# Altium PCB ring_rx_v3_sensor.PcbDoc
Units mil, origin at the board's own origin, x right, y up, seen from the top; angles counter-clockwise.
Board outline 1084 x 715 mil, 2 copper layers (L1, L2), stack 62.8 mil thick; 44 components, 30 nets, 125 pads, 35 vias.
Unrouted connection lines stored in the file: 28.
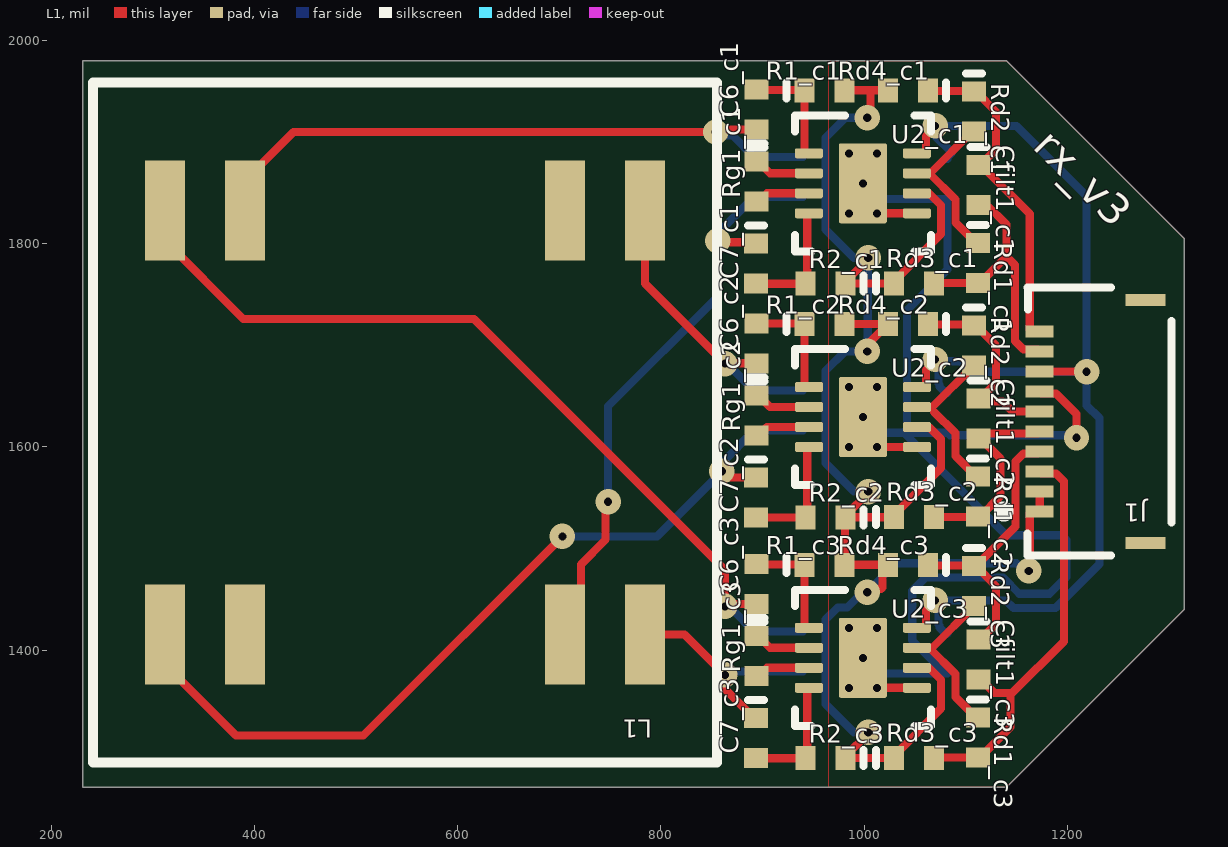
[diagram p0: L1 view]
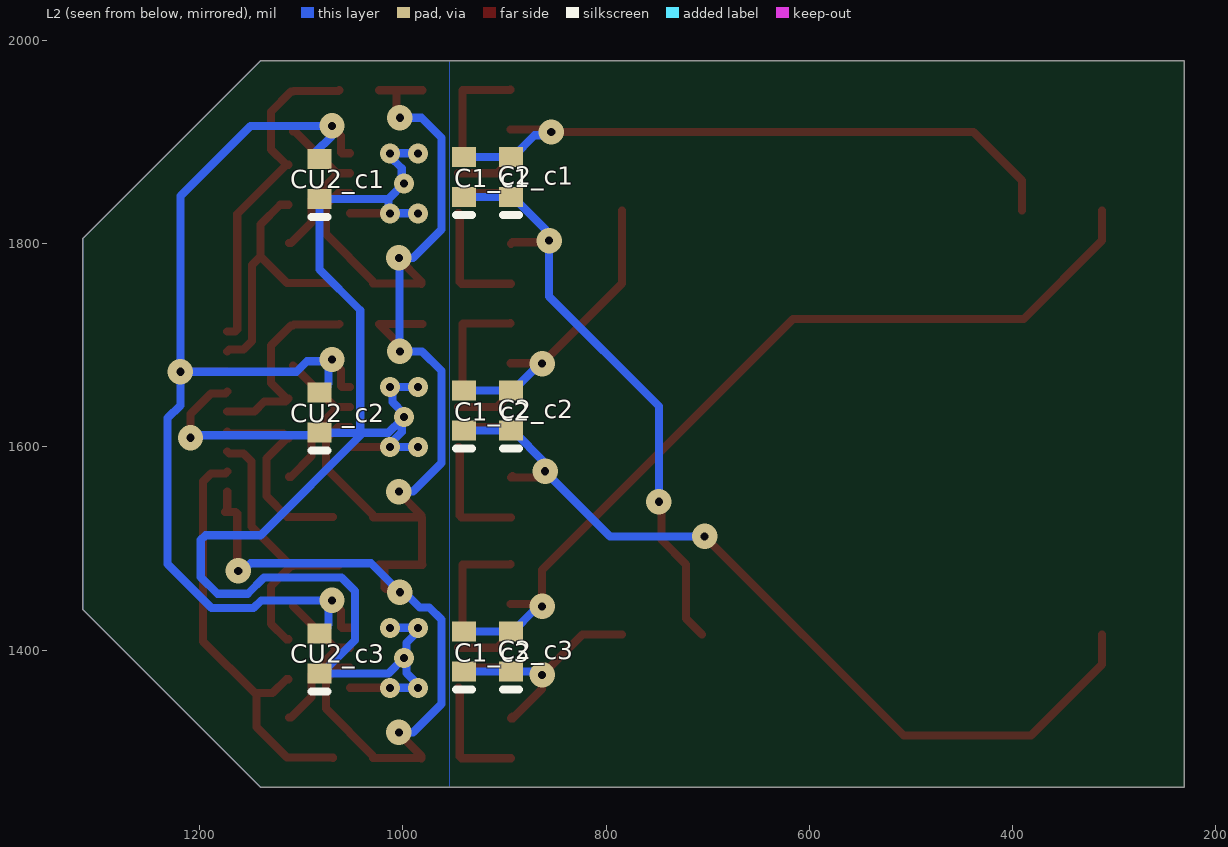
[diagram p1: L2 view, seen from below]

## Layer stack, top to bottom
Top Solder: solder mask 0.1, Solder Resist, Dk 0
L1: signal copper 1.4
Core: dielectric 60, FR-4, Dk 4.6
L2: signal copper 1.4
Bottom Solder: solder mask 0.1, Solder Resist, Dk 0

## Board outline
231,1265 1140,1265 1315,1440 1315,1805 1140,1980 231,1980

## Design rules (kind name [scope] priority, off if disabled: settings)
AssemblyTestPointUsage [All] p0: scope1count=1 scope1_0_kind=Board scope1_0_value=Board scope2count=1 scope2_0_kind=Board scope2_0_value=Board commentlength=0
AssemblyTestpoint [All] p0: scope1count=1 scope1_0_kind=Board scope1_0_value=Board scope2count=1 scope2_0_kind=Board scope2_0_value=Board commentlength=0
Clearance "Clearance~Sunstone Circuits" [All] p0: scope1count=1 scope1_0_kind=Board scope1_0_value=Board scope2count=1 scope2_0_kind=Board scope2_0_value=Board commentlength=56 gap=6 // Sunstone Circuits Minimum Clearance Rule (Double Sided)
Clearance "Clearance~Sunstone Circuits" [All] p1: gap=6 ignorepadtopadclearanceinfootprint=FALSE except(0: Arc-Hole Track-Hole SMDPad-Hole THPad-Hole Via-Hole Fill-Hole Poly-Hole Region-Hole Text-Hole) // Sunstone Circuits Minimum Clearance Rule (Double Sided)
ComponentClearance [All] p0: scope1count=1 scope1_0_kind=Board scope1_0_value=Board scope2count=1 scope2_0_kind=Board scope2_0_value=Board commentlength=0 gap=10 collisioncheckmode=3
DiffPairsRouting [All] p0: scope1count=1 scope1_0_kind=Board scope1_0_value=Board scope2count=1 scope2_0_kind=Board scope2_0_value=Board commentlength=0
FabricationTestPointUsage [All] p0: scope1count=1 scope1_0_kind=Board scope1_0_value=Board scope2count=1 scope2_0_kind=Board scope2_0_value=Board commentlength=0 valid=0 allowmultiple=FALSE
FabricationTestpoint [All] p0: scope1count=1 scope1_0_kind=Board scope1_0_value=Board scope2count=1 scope2_0_kind=Board scope2_0_value=Board commentlength=0 side=3 testpointundercomponent=TRUE minsize=40 maxsize=100 preferedsize=60 minholesize=0 maxholesize=40 preferedholesize=32 testpointgrid=1
FanoutControl Fanout_Default [All] p0: scope1count=1 scope1_0_kind=Board scope1_0_value=Board scope2count=1 scope2_0_kind=Board scope2_0_value=Board commentlength=30 // Fanout_Default (Default Rule)
FanoutControl Fanout_Small [All] p0 off: scope1count=1 scope1_0_kind=Board scope1_0_value=Board scope2count=1 scope2_0_kind=Board scope2_0_value=Board commentlength=84 // Protel DXP Scope 1 Expression Was: (CompPinCount < 5)   Fanout_Small (Default Rule)
FanoutControl Fanout_SOIC [All] p0 off: scope1count=1 scope1_0_kind=Board scope1_0_value=Board scope2count=1 scope2_0_kind=Board scope2_0_value=Board commentlength=71 // Protel DXP Scope 1 Expression Was: IsSOIC   Fanout_SOIC (Default Rule)
FanoutControl Fanout_LCC [All] p0 off: scope1count=1 scope1_0_kind=Board scope1_0_value=Board scope2count=1 scope2_0_kind=Board scope2_0_value=Board commentlength=69 // Protel DXP Scope 1 Expression Was: IsLCC   Fanout_LCC (Default Rule)
FanoutControl Fanout_BGA [All] p0 off: scope1count=1 scope1_0_kind=Board scope1_0_value=Board scope2count=1 scope2_0_kind=Board scope2_0_value=Board commentlength=69 // Protel DXP Scope 1 Expression Was: IsBGA   Fanout_BGA (Default Rule)
Height [All] p0: scope1count=1 scope1_0_kind=Board scope1_0_value=Board scope2count=1 scope2_0_kind=Board scope2_0_value=Board commentlength=0
HoleSize TestPointUsage [All] p0: scope1count=1 scope1_0_kind=Board scope1_0_value=Board scope2count=1 scope2_0_kind=Board scope2_0_value=Board commentlength=0 absolutevalues=TRUE maxlimit=100 minlimit=1 maxpercent=80.000 minpercent=20.000
HoleSize Testpoint [All] p0: scope1count=1 scope1_0_kind=Board scope1_0_value=Board scope2count=1 scope2_0_kind=Board scope2_0_value=Board commentlength=0 absolutevalues=TRUE maxlimit=100 minlimit=1 maxpercent=80.000 minpercent=20.000
HoleSize "HoleSize~Sunstone Circuits" [All] p0: scope1count=1 scope1_0_kind=Board scope1_0_value=Board scope2count=1 scope2_0_kind=Board scope2_0_value=Board commentlength=60 absolutevalues=TRUE maxlimit=251 minlimit=8 maxpercent=80.000 minpercent=20.000 // SSC Hole Size Rule For Single Sided & Double Sided Designs.
HoleSize "HoleSize~Sunstone Circuits" [All] p1: absolutevalues=TRUE maxlimit=251 minlimit=8 maxpercent=80.000 minpercent=20.000 // SSC Hole Size Rule For Single Sided & Double Sided Designs.
HoleSize Testpoint [All] p2: absolutevalues=TRUE maxlimit=100 minlimit=1 maxpercent=80.000 minpercent=20.000
HoleSize TestPointUsage [All] p3: absolutevalues=TRUE maxlimit=100 minlimit=1 maxpercent=80.000 minpercent=20.000
HoleToHoleClearance [All] p0: scope1count=1 scope1_0_kind=Board scope1_0_value=Board scope2count=1 scope2_0_kind=Board scope2_0_value=Board commentlength=0
LayerPairs [All] p0: scope1count=1 scope1_0_kind=Board scope1_0_value=Board scope2count=1 scope2_0_kind=Board scope2_0_value=Board commentlength=0 enforce=TRUE
MinimumAnnularRing "MinimumAnnularRing~Sunstone Circuits" [All] p0: scope1count=1 scope1_0_kind=Board scope1_0_value=Board scope2count=1 scope2_0_kind=Board scope2_0_value=Board commentlength=54 minimumring=7 // Sunstone Circuits Minimum Annular Ring (Double Sided)
MinimumAnnularRing "MinimumAnnularRing~Sunstone Circuits" [All] p1: minimumring=7 // Sunstone Circuits Minimum Annular Ring (Double Sided)
MinimumSolderMaskSliver [All] p0: scope1count=1 scope1_0_kind=Board scope1_0_value=Board scope2count=1 scope2_0_kind=Board scope2_0_value=Board commentlength=0
MinimumSolderMaskSliver [All] p1: minsoldermaskwidth=4
NetAntennae [All] p0: scope1count=1 scope1_0_kind=Board scope1_0_value=Board scope2count=1 scope2_0_kind=Board scope2_0_value=Board commentlength=0
PasteMaskExpansion [All] p0: scope1count=1 scope1_0_kind=Board scope1_0_value=Board scope2count=1 scope2_0_kind=Board scope2_0_value=Board commentlength=0 expansion=0
PlaneClearance "PlaneClearance~Sunstone Circuits" [All] p0: scope1count=1 scope1_0_kind=Board scope1_0_value=Board scope2count=1 scope2_0_kind=Board scope2_0_value=Board commentlength=60 clearance=12 // Sunstone Circuits Power Plane Clearance Rule (Double Sided)
PlaneClearance "PlaneClearance~Sunstone Circuits" [All] p1: clearance=12 // Sunstone Circuits Power Plane Clearance Rule (Double Sided)
PlaneConnect "PlaneConnect~Sunstone Circuits" [All] p0: scope1count=1 scope1_0_kind=Board scope1_0_value=Board scope2count=1 scope2_0_kind=Board scope2_0_value=Board commentlength=58 planeconnectstyle=Relief reliefexpansion=10 reliefentries=4 reliefconductorwidth=8 reliefairgap=10 // Sunstone Circuits Power Plane Connect Rule (Double Sided)
PlaneConnect "PlaneConnect~Sunstone Circuits" [All] p1: planeconnectstyle=Relief reliefexpansion=10 reliefentries=4 reliefconductorwidth=8 reliefairgap=10 // Sunstone Circuits Power Plane Connect Rule (Double Sided)
PolygonConnect "PolygonConnect~Sunstone Circuits" [All] p0: scope1count=1 scope1_0_kind=Board scope1_0_value=Board scope2count=1 scope2_0_kind=Board scope2_0_value=Board commentlength=55 connectstyle=Relief reliefconductorwidth=8 reliefentries=4 polygonreliefangle="90 Angle" // Sunstone Circuits Polygon Connect Style (Double Sided)
PolygonConnect "PolygonConnect~Sunstone Circuits" [All] p1: connectstyle=Relief reliefconductorwidth=8 reliefentries=4 polygonreliefangle="90 Angle" airgapwidth=10 // Sunstone Circuits Polygon Connect Style (Double Sided)
RoomDefinition c1 [All] p0: scope1count=1 scope1_0_kind=ComponentClass scope1_0_value=c1 scope2count=1 scope2_0_kind=Board scope2_0_value=Board commentlength=0 region_x1=8700000 region_y1=17350000 region_x2=11380000 region_y2=19750000 confinementstyle=ConfineIn
RoomDefinition c3 [All] p0: scope1count=1 scope1_0_kind=ComponentClass scope1_0_value=c3 scope2count=1 scope2_0_kind=Board scope2_0_value=Board commentlength=0 region_x1=8700000 region_y1=12680000 region_x2=11380000 region_y2=15080000 confinementstyle=ConfineIn
RoomDefinition c2 [All] p0: scope1count=1 scope1_0_kind=ComponentClass scope1_0_value=c2 scope2count=1 scope2_0_kind=Board scope2_0_value=Board commentlength=0 region_x1=8700000 region_y1=15050000 region_x2=11380000 region_y2=17450000 confinementstyle=ConfineIn
RoomDefinition c1 [InComponentClass('c1')] p1: confinementstyle=ConfineIn formatcopy=TRUE lockcomponents=FALSE outline 870,1735 1138,1735 1138,1975 870,1975
RoomDefinition c3 [InComponentClass('c3')] p2: confinementstyle=ConfineIn formatcopy=TRUE lockcomponents=FALSE outline 870,1268 1138,1268 1138,1508 870,1508
RoomDefinition c2 [InComponentClass('c2')] p3: confinementstyle=ConfineIn formatcopy=TRUE lockcomponents=FALSE outline 870,1505 1138,1505 1138,1745 870,1745
RoutingCorners [All] p0: scope1count=1 scope1_0_kind=Board scope1_0_value=Board scope2count=1 scope2_0_kind=Board scope2_0_value=Board commentlength=0 cornerstyle=45-Degree minsetback=100 maxsetback=100
RoutingLayers [All] p0: scope1count=1 scope1_0_kind=Board scope1_0_value=Board scope2count=1 scope2_0_kind=Board scope2_0_value=Board commentlength=0 top layer=Automatic bottom layer=Automatic
RoutingPriority [All] p0: scope1count=1 scope1_0_kind=Board scope1_0_value=Board scope2count=1 scope2_0_kind=Board scope2_0_value=Board commentlength=0
RoutingTopology [All] p0: scope1count=1 scope1_0_kind=Board scope1_0_value=Board scope2count=1 scope2_0_kind=Board scope2_0_value=Board commentlength=0 topology=Shortest
RoutingVias "RoutingVias~Sunstone Circuits" [All] p0: scope1count=1 scope1_0_kind=Board scope1_0_value=Board scope2count=1 scope2_0_kind=Board scope2_0_value=Board commentlength=51 holewidth=8 width=25 viastyle="Through Hole" minholewidth=8 minwidth=25 maxholewidth=20 maxwidth=40 // Sunstone Circuits Routing Vias Rule (Double Sided)
RoutingVias "RoutingVias~Sunstone Circuits" [All] p1: holewidth=8 width=25 viastyle="Through Hole" minholewidth=8 minwidth=25 maxholewidth=20 maxwidth=40 // Sunstone Circuits Routing Vias Rule (Double Sided)
ShortCircuit "ShortCircuit~Sunstone Circuits" [All] p0: scope1count=1 scope1_0_kind=Board scope1_0_value=Board scope2count=1 scope2_0_kind=Board scope2_0_value=Board commentlength=65 allowed=FALSE // Sunstone Circuits Short Circuit Rule~Do Not Allow (Double Sided)
ShortCircuit "ShortCircuit~Sunstone Circuits" [All] p1: allowed=FALSE // Sunstone Circuits Short Circuit Rule~Do Not Allow (Double Sided)
SilkToBoardRegionClearance [All] p0: scope1count=1 scope1_0_kind=Board scope1_0_value=Board scope2count=1 scope2_0_kind=Board scope2_0_value=Board commentlength=0
SilkToSilkClearance [All] p0: scope1count=1 scope1_0_kind=Board scope1_0_value=Board scope2count=1 scope2_0_kind=Board scope2_0_value=Board commentlength=0
SilkToSolderMaskClearance [All] p0 off: scope1count=1 scope1_0_kind=Board scope1_0_value=Board scope2count=1 scope2_0_kind=Board scope2_0_value=Board commentlength=44 // Protel DXP Scope 1 Expression Was: IsPad
SolderMaskExpansion "SolderMaskExpansion~Sunstone Circuits" [All] p0: scope1count=1 scope1_0_kind=Board scope1_0_value=Board scope2count=1 scope2_0_kind=Board scope2_0_value=Board commentlength=60 expansion=3 // Sunstone Circuits Solder Mask Expansion Rule (Double Sided)
SolderMaskExpansion "SolderMaskExpansion~Sunstone Circuits" [All] p1: expansion=3 // Sunstone Circuits Solder Mask Expansion Rule (Double Sided)
UnRoutedNet [All] p0: scope1count=1 scope1_0_kind=Board scope1_0_value=Board scope2count=1 scope2_0_kind=Board scope2_0_value=Board commentlength=0
UnpouredPolygon [All] p0: scope1count=1 scope1_0_kind=Board scope1_0_value=Board scope2count=1 scope2_0_kind=Board scope2_0_value=Board commentlength=0
ViasUnderSMD "ViasUnderSMD~Sunstone Circuits" [All] p0: scope1count=1 scope1_0_kind=Board scope1_0_value=Board scope2count=1 scope2_0_kind=Board scope2_0_value=Board commentlength=61 allowed=FALSE // Sunstone Circuits Vias Under SMD~Do Not Allow (Double Sided)
ViasUnderSMD "ViasUnderSMD~Sunstone Circuits" [All] p1: allowed=FALSE // Sunstone Circuits Vias Under SMD~Do Not Allow (Double Sided)
Width "Width~Sunstone Circuits" [All] p0: scope1count=1 scope1_0_kind=Board scope1_0_value=Board scope2count=1 scope2_0_kind=Board scope2_0_value=Board commentlength=52 maxlimit=15 minlimit=8 preferedwidth=8 // Sunstone Circuits Minimum Width Rule (Double Sided)
Width "Width~Sunstone Circuits" [All] p1: maxlimit=15 minlimit=8 preferedwidth=8 minimp=50.000000 maximp=50.000000 favimp=50.000000 // Sunstone Circuits Minimum Width Rule (Double Sided)
25 further rules are at their usual default settings.

## Classes and differential pairs
component class coil_processing: J1
component class c3: C1_c3 C2_c3 C6_c3 C7_c3 Cfilt1_c3 CU2_c3 R1_c3 R2_c3 Rd1_c3 Rd2_c3 Rd3_c3 Rd4_c3 Rg1_c3 U2_c3
component class c2: C1_c2 C2_c2 C6_c2 C7_c2 Cfilt1_c2 CU2_c2 R1_c2 R2_c2 Rd1_c2 Rd2_c2 Rd3_c2 Rd4_c2 Rg1_c2 U2_c2
component class c1: C1_c1 C2_c1 C6_c1 C7_c1 Cfilt1_c1 CU2_c1 R1_c1 R2_c1 Rd1_c1 Rd2_c1 Rd3_c1 Rd4_c1 Rg1_c1 U2_c1
channel class coils: c12 c22 c32

## Components (designator, comment, footprint, x,y, rotation, side; value= is the part's Value field where it differs from the comment)
C1_c1 "Cap" 0402 939.68,1865.68 r90 bottom (schematic designator C1)
C1_c2 "Cap" 0402 939.68,1635.68 r90 bottom (schematic designator C1)
C1_c3 "Cap" 0402 939.68,1398.68 r90 bottom (schematic designator C1)
C2_c1 "Cap" 0402 893.68,1865.68 r90 bottom (schematic designator C2)
C2_c2 "Cap" 0402 893.68,1635.68 r90 bottom (schematic designator C2)
C2_c3 "Cap" 0402 893.68,1398.68 r90 bottom (schematic designator C2)
C6_c1 "Cap" 0402 894,1932 r90 top (schematic designator C6)
C6_c2 "Cap" 0402 894,1702 r90 top (schematic designator C6)
C6_c3 "Cap" 0402 894,1465 r90 top (schematic designator C6)
C7_c1 "Cap" 0402 893.63,1780.32 r270 top (schematic designator C7)
C7_c2 "Cap" 0402 893.63,1550.32 r270 top (schematic designator C7)
C7_c3 "Cap" 0402 893.63,1313.32 r270 top (schematic designator C7)
Cfilt1_c1 "Cap" 0402 1112.63,1858 r270 top (schematic designator Cfilt1)
Cfilt1_c2 "Cap" 0402 1112.63,1628 r270 top (schematic designator Cfilt1)
Cfilt1_c3 "Cap" 0402 1112.63,1391 r270 top (schematic designator Cfilt1)
CU2_c1 "Cap" 0402 1082,1863.68 r90 bottom (schematic designator CU2)
CU2_c2 "Cap" 0402 1082,1633.68 r90 bottom (schematic designator CU2)
CU2_c3 "Cap" 0402 1082,1396.68 r90 bottom (schematic designator CU2)
J1 "503480-1000" MOLX-503480-1000 1225,1625 r90 top
L1 "3DV09-A" 3DC15 548,1624 r180 top
R1_c1 "Res" 0402 961,1951 r0 top (schematic designator R1)
R1_c2 "Res" 0402 961,1721 r0 top (schematic designator R1)
R1_c3 "Res" 0402 961,1484 r0 top (schematic designator R1)
R2_c1 "Res" 0402 962,1760.63 r180 top (schematic designator R2)
R2_c2 "Res" 0402 962,1530.63 r180 top (schematic designator R2)
R2_c3 "Res" 0402 962,1293.63 r180 top (schematic designator R2)
Rd1_c1 "Res" 0402 1112,1781 r270 top (schematic designator Rd1)
Rd1_c2 "Res" 0402 1112,1551 r270 top (schematic designator Rd1)
Rd1_c3 "Res" 0402 1112,1314 r270 top (schematic designator Rd1)
Rd2_c1 "Res" 0402 1108,1930 r270 top (schematic designator Rd2)
Rd2_c2 "Res" 0402 1108,1700 r270 top (schematic designator Rd2)
Rd2_c3 "Res" 0402 1108,1463 r270 top (schematic designator Rd2)
Rd3_c1 "Res" 0402 1049,1761 r0 top (schematic designator Rd3)
Rd3_c2 "Res" 0402 1049,1531 r0 top (schematic designator Rd3)
Rd3_c3 "Res" 0402 1049,1294 r0 top (schematic designator Rd3)
Rd4_c1 "Res" 0402 1043,1951 r180 top (schematic designator Rd4)
Rd4_c2 "Res" 0402 1043,1721 r180 top (schematic designator Rd4)
Rd4_c3 "Res" 0402 1043,1484 r180 top (schematic designator Rd4)
Rg1_c1 "Res" 0402 894,1861 r270 top (schematic designator Rg1)
Rg1_c2 "Res" 0402 894,1631 r270 top (schematic designator Rg1)
Rg1_c3 "Res" 0402 894,1394 r270 top (schematic designator Rg1)
U2_c1 "INA826AIDRGT" DRG0008A_V 998.85,1859.47 r0 top (schematic designator U2)
U2_c2 "INA826AIDRGT" DRG0008A_V 998.85,1629.47 r0 top (schematic designator U2)
U2_c3 "INA826AIDRGT" DRG0008A_V 998.85,1392.47 r0 top (schematic designator U2)

## Footprints (in the part's own frame and the unit in brackets; to place one, negate y for a bottom-side part, rotate by r counter-clockwise, add the part's x,y. Pads: shape width x height; smd on the part's side, far side on the other; paste and mask are expansions set on the pad)
3DC15 [mm] "premo coil"
  rect 1x2.5 smd: 1(6,5.3) 2(4,5.3) 3(-4,5.3) 4(-6,5.3) 5(-6,-5.3) 6(-4,-5.3) 7(4,-5.3) 8(6,-5.3)
  silkscreen extent -7.8,-8.5 7.8,8.5
0402 [mm] "Surface Mount; Body 1 x 0.5 mm (LxW typ)"
  rect 0.5x0.6 smd: 1(-0.5,0) 2(0.5,0)
  silkscreen extent -0.95,-0.2 -0.95,0.2
DRG0008A_V [mm] "SON, 8-Leads, Body 3x3mm, Pitch 0.5mm, Thermal Pad 2x1.2mm, TI Recommended"
  rrect40% 0.7x0.25 smd: 1(-1.35,0.75) 2(-1.35,0.25) 3(-1.35,-0.25) 4(-1.35,-0.75) 5(1.35,-0.75) 6(1.35,-0.25) 7(1.35,0.25) 8(1.35,0.75)
  rrect8% 1.2x2 smd paste-0.6: 9(0,0)
  Drill Guide keep-out region: 0.6,-1 -0.6,-1 -0.6,-1.3 0.6,-1.3
  Drill Guide keep-out region: -0.6,1 0.6,1 0.6,1.3 -0.6,1.3
  silkscreen extent -1.7,-1.7 1.7,1.7
MOLX-503480-1000 [mm] "FPC Connector, 10-Leads, Right Angle, Pitch 0.5 mm, Mated Height 1.0 mm, SMT"
  rect 0.3x0.7 smd: 1(-2.25,1.325) 2(-1.75,1.325) 3(-1.25,1.325) 4(-0.75,1.325) 5(-0.25,1.325) 6(0.25,1.325) 7(0.75,1.325) 8(1.25,1.325) 9(1.75,1.325) 10(2.25,1.325)
  rect 0.3x1 smd: MP1(-3.04,-1.325) MP2(3.04,-1.325)
  silkscreen extent -3.35,-1.98 3.35,2.35

## Part data
C1_c1 C1_c2 C1_c3 C2_c1 C2_c2 C2_c3 C6_c1 C6_c2 C6_c3 C7_c1 C7_c2 C7_c3 Cfilt1_c1 Cfilt1_c2 Cfilt1_c3 CU2_c1 CU2_c2 CU2_c3: "Ceramic Capacitor (Surface Mount)"
J1: library part CMP-1241-00115-1, "0.5 mm Pitch Easy-On(TM) BackFlip(TM) Type FPC Connector, 1.0 mm Mated Height, Right Angle, SMT, Dual Contact, 10 Circuits, -40 to 85 degC, ELV and RoHS Compliant, Tape and Reel"
R1_c1 R1_c2 R1_c3 R2_c1 R2_c2 R2_c3 Rd1_c1 Rd1_c2 Rd1_c3 Rd2_c1 Rd2_c2 Rd2_c3 Rd3_c1 Rd3_c2 Rd3_c3 Rd4_c1 Rd4_c2 Rd4_c3 Rg1_c1 Rg1_c2 Rg1_c3: "Chip Resistor (Surface Mount)"
U2_c1 U2_c2 U2_c3: library part CMP-0944-00099-2, "Precision, 200-uA Supply Current, 36-V Supply Instrumentation Amplifier, -40 to 125 degC, 8-pin SON (DRG8), Green (RoHS & no Sb/Br)"

## Via types
v1: diameter 25, hole 8, L1 to L2, 20 vias
v2: diameter 19.68, hole 7.87, L1 to L2, 15 vias

## Nets (pads, with @x,y where several pads share a name; then routed paths per layer and width w, separated by ;. In a path a pad name is that pad's centre, name@x,y a point inside that pad or via, vN(x,y) a via of type N, cw(c..) or ccw(c..) an arc to the next point about the centre after c; other vN are vias at no path point)
ch1+: Cfilt1_c1.2 J1.9 Rd1_c1.2 Rd3_c1.2 | length 264.6
  L1 w8: Rd3_c1.2 1068.84,1761.16 1111.84,1761.16 Rd1_c1.2 1113.97,1761.31 1140,1787.35 ; Cfilt1_c1.2 1120.69,1838.31 1140,1819 1140,1787.35 ; J1.9 1170.93,1695.8 1156.79,1695.8 1148.39,1704.2 1148.39,1778.95 1140,1787.35
ch1-: Cfilt1_c1.1 J1.10 Rd2_c1.1 Rd4_c1.1 | length 329.2
  L1 w8: Rd4_c1.1 1063.34,1950.34 1107.34,1950.34 Rd2_c1.1 1109.97,1949.68 1129.81,1929.84 1129.81,1892.9 Cfilt1_c1.1@1114.6,1877.68 ; Cfilt1_c1.1 Cfilt1_c1.1@1114.6,1877.68 ; J1.10 1164.96,1713.58 1163.06,1715.49 1163.06,1829.23 Cfilt1_c1.1@1114.6,1877.68
ch2+: Cfilt1_c2.2 J1.5 Rd1_c2.2 Rd3_c2.2 | length 197.1
  L1 w8: Rd3_c2.2 1068.84,1531.16 1111.84,1531.16 Rd1_c2.2 1113.97,1531.31 1134.34,1551.69 1134.34,1588.57 1114.6,1608.31 Cfilt1_c2.2 ; Cfilt1_c2.2@1117.57,1613.25 1170.93,1613.25 J1.5
ch2-: Cfilt1_c2.1 J1.6 Rd2_c2.1 Rd4_c2.1 | length 201.8
  L1 w8: Rd4_c2.1 1063.34,1720.34 1107.34,1720.34 Rd2_c2.1 1109.97,1719.68 1129.81,1699.84 1129.81,1662.9 1114.6,1647.68 Cfilt1_c2.1 1115.71,1644.6 1136.44,1644.6 1146.2,1634.84 J1.6
ch3+: Cfilt1_c3.2 J1.3 Rd1_c3.2 Rd3_c3.2 | length 417.3
  L1 w8: Rd3_c3.2 1068.84,1294.16 1111.84,1294.16 Rd1_c3.2 1113.97,1294.31 1144,1324.35 1144,1357.66 ; Cfilt1_c3.2 1114.6,1371.31 1128.26,1357.66 1144,1357.66 ; J1.3 1174.74,1573.88 1188.88,1573.88 1196.61,1566.15 1196.61,1408.61 1145.66,1357.66 1144,1357.66
ch3-: Cfilt1_c3.1 J1.4 Rd2_c3.1 Rd4_c3.1 | length 283.4
  L1 w8: Rd4_c3.1 1063.34,1483.34 1107.34,1483.34 Rd2_c3.1 Rd2_c3.1@1109.97,1482.68 ; Cfilt1_c3.1 1114.6,1410.68 1129.81,1425.9 1129.81,1462.84 Rd2_c3.1@1109.97,1482.68 ; J1.4 1170.93,1593.57 1156.79,1593.57 1149.06,1585.84 1149.06,1521.77 Rd2_c3.1@1109.97,1482.68
coil_amp_c1: Rd1_c1.1 Rd2_c1.2 U2_c1.7 | length 162.6
  L1 w8: U2_c1.7 1060.86,1869.32 U2_c1.7@1064.12,1869.32 ; Rd2_c1.2 1106.03,1910.31 1065.03,1869.32 U2_c1.7@1064.12,1869.32 ; Rd1_c1.1 1110.03,1800.68 1089.78,1820.94 1089.78,1843.65 U2_c1.7@1064.12,1869.32
coil_amp_c2: Rd1_c2.1 Rd2_c2.2 U2_c2.7 | length 155.9
  L1 w8: U2_c2.7 1060.86,1639.32 1067,1639.32 Rd2_c2.2 ; 1068.88,1634.55 1089.78,1613.65 1089.78,1590.94 1110.03,1570.68 Rd1_c2.1
coil_amp_c3: Rd1_c3.1 Rd2_c3.2 U2_c3.7 | length 162.6
  L1 w8: U2_c3.7 1060.86,1402.32 U2_c3.7@1064.12,1402.32 ; Rd2_c3.2 1067,1402.32 U2_c3.7@1064.12,1402.32 ; Rd1_c3.1 1110.03,1333.68 1089.78,1353.94 1089.78,1376.65 U2_c3.7@1064.12,1402.32
GND: CU2_c1.1 CU2_c2.1 CU2_c3.1 J1.7 U2_c1.5 U2_c1.9 U2_c2.5 U2_c2.9 U2_c3.5 U2_c3.9 | length 1670.7
  L1 w8: U2_c3.9@1019.47,1363 1049,1363 1049.06,1362.94 U2_c3.5 ; U2_c2.9@1019.53,1599.94 1048.94,1599.94 1049,1600 1049.06,1599.94 U2_c2.5 ; U2_c1.9@1019.53,1829.94 1048.94,1829.94 1049,1830 1049.06,1829.94 U2_c1.5 ; J1.7 1174.74,1652.62 1188.88,1652.62 1209,1632.5 v1(1209,1609)
  L2 w8: v2(985.07,1599.94) v2(1012.63,1599.94) 1012.63,1603.11 1001.09,1614.65 v2@1001.09,1627.24 ; v2(985.07,1659) v2(1012.63,1659) 1010.39,1656.76 1010.39,1644.18 998.85,1632.63 v2(998.85,1629.47) v2@1001.09,1627.24 ; v2(985.07,1829.94) v2(1012.63,1829.94) 1014.32,1831.64 1014.32,1844 ; v2(985.07,1889) v2(1012.63,1889) 1012.63,1885.84 1001.09,1874.29 1001.09,1861.71 v2(998.85,1859.47) 1014.32,1844 ; v2(1012.63,1362.94) v2(985.07,1362.94) 985.07,1366.11 996.61,1377.65 996.61,1390.24 v2(998.85,1392.47) ; v2(1012.63,1422) v2(985.07,1422) 985.07,1418.84 996.61,1407.29 996.61,1394.71 v2(998.85,1392.47) ; CU2_c3.1 CU2_c3.1@1080.03,1377 ; v1(1209,1609) 1206.5,1611.5 1084.5,1611.5 CU2_c2.1 1039,1614 ; v2(998.85,1392.47) 1014.32,1377 CU2_c3.1@1080.03,1377 ; v2@1001.09,1627.24 1014.32,1614 1039,1614 ; 1014.32,1844 CU2_c1.1 1082,1774.48 1042,1734.48 1042,1617 1039,1614 ; 1039,1614 1140,1513 1194.31,1513 1199,1508.31 1199,1472 1182.5,1455.5 1152.68,1455.5 1136.68,1471.5 1060.48,1471.5 1047.3,1458.32 1047.3,1409.74 CU2_c3.1@1080.03,1377
NetC6_c1_2: C6_c1.2 R1_c1.1 U2_c1.1 | length 113.4
  L1 w8: C6_c1.2 894.34,1951.34 940.97,1951.34 R1_c1.1 941.32,1889.92 942.24,1889 U2_c1.1
NetC6_c2_2: C6_c2.2 R1_c2.1 U2_c2.1 | length 113.4
  L1 w8: C6_c2.2 894.34,1721.34 940.97,1721.34 R1_c2.1 941.32,1659.92 942.24,1659 U2_c2.1
NetC6_c3_2: C6_c3.2 R1_c3.1 U2_c3.1 | length 113.4
  L1 w8: C6_c3.2 894.34,1484.34 940.97,1484.34 R1_c3.1 941.32,1422.92 942.24,1422 U2_c3.1
NetC7_c1_2: C7_c1.2 R2_c1.2 U2_c1.4 | length 119.9
  L1 w8: C7_c1.2 R2_c1.2 944.01,1762.32 944.01,1829.02 944.93,1829.94 U2_c1.4
NetC7_c2_2: C7_c2.2 R2_c2.2 U2_c2.4 | length 119.9
  L1 w8: C7_c2.2 R2_c2.2 944.01,1532.32 944.01,1599.02 944.93,1599.94 U2_c2.4
NetC7_c3_2: C7_c3.2 R2_c3.2 U2_c3.4 | length 119.9
  L1 w8: C7_c3.2 R2_c3.2 944.01,1295.32 944.01,1362.02 944.93,1362.94 U2_c3.4
NetRg1_c1_1: Rg1_c1.1 U2_c1.2 | length 56.4
  L1 w8: Rg1_c1.1 895.97,1880.68 907.34,1869.32 U2_c1.2
NetRg1_c1_2: Rg1_c1.2 U2_c1.3 | length 55.1
  L1 w8: Rg1_c1.2 895.97,1841.31 904.28,1849.63 U2_c1.3
NetRg1_c2_1: Rg1_c2.1 U2_c2.2 | length 56.4
  L1 w8: Rg1_c2.1 895.97,1650.68 907.34,1639.32 U2_c2.2
NetRg1_c2_2: Rg1_c2.2 U2_c2.3 | length 55.1
  L1 w8: Rg1_c2.2 895.97,1611.31 904.28,1619.63 U2_c2.3
NetRg1_c3_1: Rg1_c3.1 U2_c3.2 | length 56.4
  L1 w8: Rg1_c3.1 895.97,1413.68 907.34,1402.32 U2_c3.2
NetRg1_c3_2: Rg1_c3.2 U2_c3.3 | length 55.1
  L1 w8: Rg1_c3.2 895.97,1374.31 904.28,1382.63 U2_c3.3
raw_ch1+: C1_c1.2 C2_c1.2 C6_c1.1 L1.7 | length 649.7
  L1 w8: L1.7 390.52,1862.19 438.33,1910 v1(854,1910) 856.32,1912.32 C6_c1.1
  L2 w8: v1(854,1910) 857.25,1906.75 870.34,1906.75 891.72,1885.37 C2_c1.2 C1_c1.2
raw_ch1-: C1_c1.1 C2_c1.1 C7_c1.1 L1.3 | length 594.6
  L1 w8: L1.3 721.17,1431.02 721.17,1484.27 745.5,1508.6 745.5,1543.5 v1(748,1546) ; v1(856,1803) 857.5,1801.5 892.13,1801.5 C7_c1.1
  L2 w8: v1(748,1546) 748,1640 856,1748 v1(856,1803) 859.25,1806.25 859.25,1813.54 891.72,1846 C2_c1.1 C1_c1.1
raw_ch2+: C1_c2.2 C2_c2.2 C6_c2.1 L1.5 | length 303.6
  L1 w8: L1.5 784.22,1760.78 861,1684 861,1685.2 863.89,1682.32 C6_c2.1
  L2 w8: v1(863,1682) 865.09,1682 891.72,1655.37 C2_c2.2 C1_c2.2
raw_ch2-: C1_c2.1 C2_c2.1 C7_c2.1 L1.1 | length 855.5
  L1 w8: L1.1 311.78,1385.81 381.59,1316 507,1316 v1(703,1512) ; v1(860,1576) 863,1573 863,1570 C7_c2.1 C7_c2.1@892.13,1571.5
  L2 w8: v1(703,1512) 796,1512 v1(860,1576) 860,1584.28 891.72,1616 C2_c2.1 C1_c2.1
raw_ch3+: C1_c3.2 C2_c3.2 C6_c3.1 L1.8 | length 869.9
  L1 w8: L1.8 311.78,1803.13 388.91,1726 616,1726 863,1479 v1(863,1443) 865.32,1445.32 C6_c3.1
  L2 w8: v1(863,1443) 866.25,1439.75 870.34,1439.75 891.72,1418.37 C2_c3.2 C1_c3.2
raw_ch3-: C1_c3.1 C2_c3.1 C7_c3.1 L1.4 | length 238.1
  L1 w8: L1.4 823.29,1415.34 v1(863,1375.63) 863,1361.66 C7_c3.1@891.66,1333 ; C7_c3.1@892.13,1334.5 C7_c3.1
  L2 w8: v1@861.6,1375.63 v1(863,1375.63) 859.63,1379 C2_c3.1 C1_c3.1
V1.2: J1.1 J1.2 R1_c1.2 R1_c2.2 R1_c3.2 R2_c1.1 R2_c2.1 R2_c3.1 Rd3_c1.1 Rd3_c2.1 Rd3_c3.1 Rd4_c1.2 Rd4_c2.2 Rd4_c3.2 U2_c1.6 U2_c2.6 U2_c3.6 | length 1833.9
  L1 w8: R1_c2.2 Rd4_c2.2 1006.25,1703.94 1006.25,1697.25 v1(1003,1694) ; R1_c1.2 1006.25,1951 ; v1(1003,1457) 1006.25,1460.25 1016.76,1460.25 1018.19,1461.69 1018.19,1478.87 Rd4_c3.2 R1_c3.2 981.18,1484.5 981.18,1530.13 R2_c2.1 ; v1(1003,1924) 1006.25,1927.25 1006.25,1951 ; v1(1004,1319) 1004,1317.91 981.68,1295.6 R2_c3.1 981.87,1293.81 1029.13,1293.81 Rd3_c3.1 1029.32,1295.97 1075.78,1342.43 1075.78,1370.86 1064,1382.63 U2_c3.6 ; v1(1004,1556) 1004,1554.91 981.68,1532.6 R2_c2.1 ; v1(1004,1786) 1004,1784.91 981.68,1762.6 R2_c1.1 981.87,1760.81 1029.13,1760.81 Rd3_c1.1 1029.32,1762.97 1075.78,1809.43 1075.78,1837.86 1064,1849.63 U2_c1.6 ; Rd4_c1.2 1006.25,1951 ; U2_c2.6 1064,1619.63 1075.78,1607.86 1075.78,1579.43 1029.32,1532.97 Rd3_c2.1 1029.13,1530.81 981.87,1530.81 R2_c2.1 ; v1(1162,1478) 1163.06,1479.06 1163.06,1534.51 1164.57,1536.03 1175,1536.03 1172.83,1538.2 J1.2
  L2 w8: v1(1003,1694) 981,1694 962,1675 962,1584 990,1556 v1(1004,1556) v1@1003.5,1555.5 ; v1(1003,1924) 981.69,1924 962,1904.31 962,1814 990,1786 v1(1004,1786) 1003.5,1785.5 v1@1003.5,1694.5 ; v1(1004,1319) 990,1319 962,1347 962,1430 974,1442 983.4,1442 998.4,1457 v1(1003,1457) 1031.5,1485.5 1149.9,1485.5 1157.4,1478 v1(1162,1478)
VCC: CU2_c1.2 CU2_c2.2 CU2_c3.2 J1.8 U2_c1.8 U2_c2.8 U2_c3.8 | length 1164.9
  L1 w8: U2_c3.8 1060,1422 1060.92,1422.92 1060.92,1438.92 1069,1447 1069,1448.2 v1(1069.8,1449) ; U2_c2.8 1060,1659 1060.92,1659.92 1060.92,1675.92 1069,1684 1069,1685.2 v1(1069.8,1686) ; U2_c1.8 1060,1889 1060.92,1889.92 1060.92,1905.92 1069,1914 1069,1915.2 v1(1069.8,1916) ; J1.8 1218.79,1674.21 v1(1219,1674)
  L2 w8: v1(1069.8,1686) v1@1071.49,1684.3 ; CU2_c3.2 1080.03,1416.37 1074.19,1422.21 1074.19,1424.18 1073.05,1425.32 1073.05,1445.75 v1(1069.8,1449) 1073.05,1449 1139.38,1449 1146.88,1441.5 1188.3,1441.5 1231.5,1484.7 1231.5,1628.29 1219,1640.79 v1(1219,1674) ; CU2_c2.2 1080.03,1653.37 1074.19,1659.21 1074.19,1661.18 1073.05,1662.32 1073.05,1682.75 v1@1071.49,1684.3 ; CU2_c1.2 1080.03,1883.37 1086.33,1889.67 1069.8,1906.2 v1(1069.8,1916) 1150,1916 1219,1847 v1(1219,1674) ; v1@1071.49,1684.3 1094.3,1684.3 1104.6,1674 v1(1219,1674)
pads on no net: J1.MP1 J1.MP2 L1.2 L1.6

## Polygon pours and split planes (outlines as drawn)
GND on L2 "L2-GND" (solid, pour order 6): 954,1980 1140,1980 1315,1805 1315,1440 1140,1265 954,1265
no net on L1 "L1-No Net" (solid, pour order 8): 965,1980 1140,1980 1315,1805 1315,1440 1140,1265 965,1265

## Silkscreen, mask and mechanical layers (free items; w line width, h text height)
Top Overlay:
  text "rx_v3" at 1165,1894.6 h30 r315.09
Courtyard Top:
  the board outline again, w10